# Altium PCB PCBA-2121-01_tabbed.PcbDoc
Units mm, origin at the board's own origin, x right, y up, seen from the top; angles counter-clockwise.
Board outline 63.5 x 75 mm, 4 copper layers (L1, L2, L3, L4), stack 1.58 mm thick; 4 components, 51 nets, 44 pads, 0 vias.
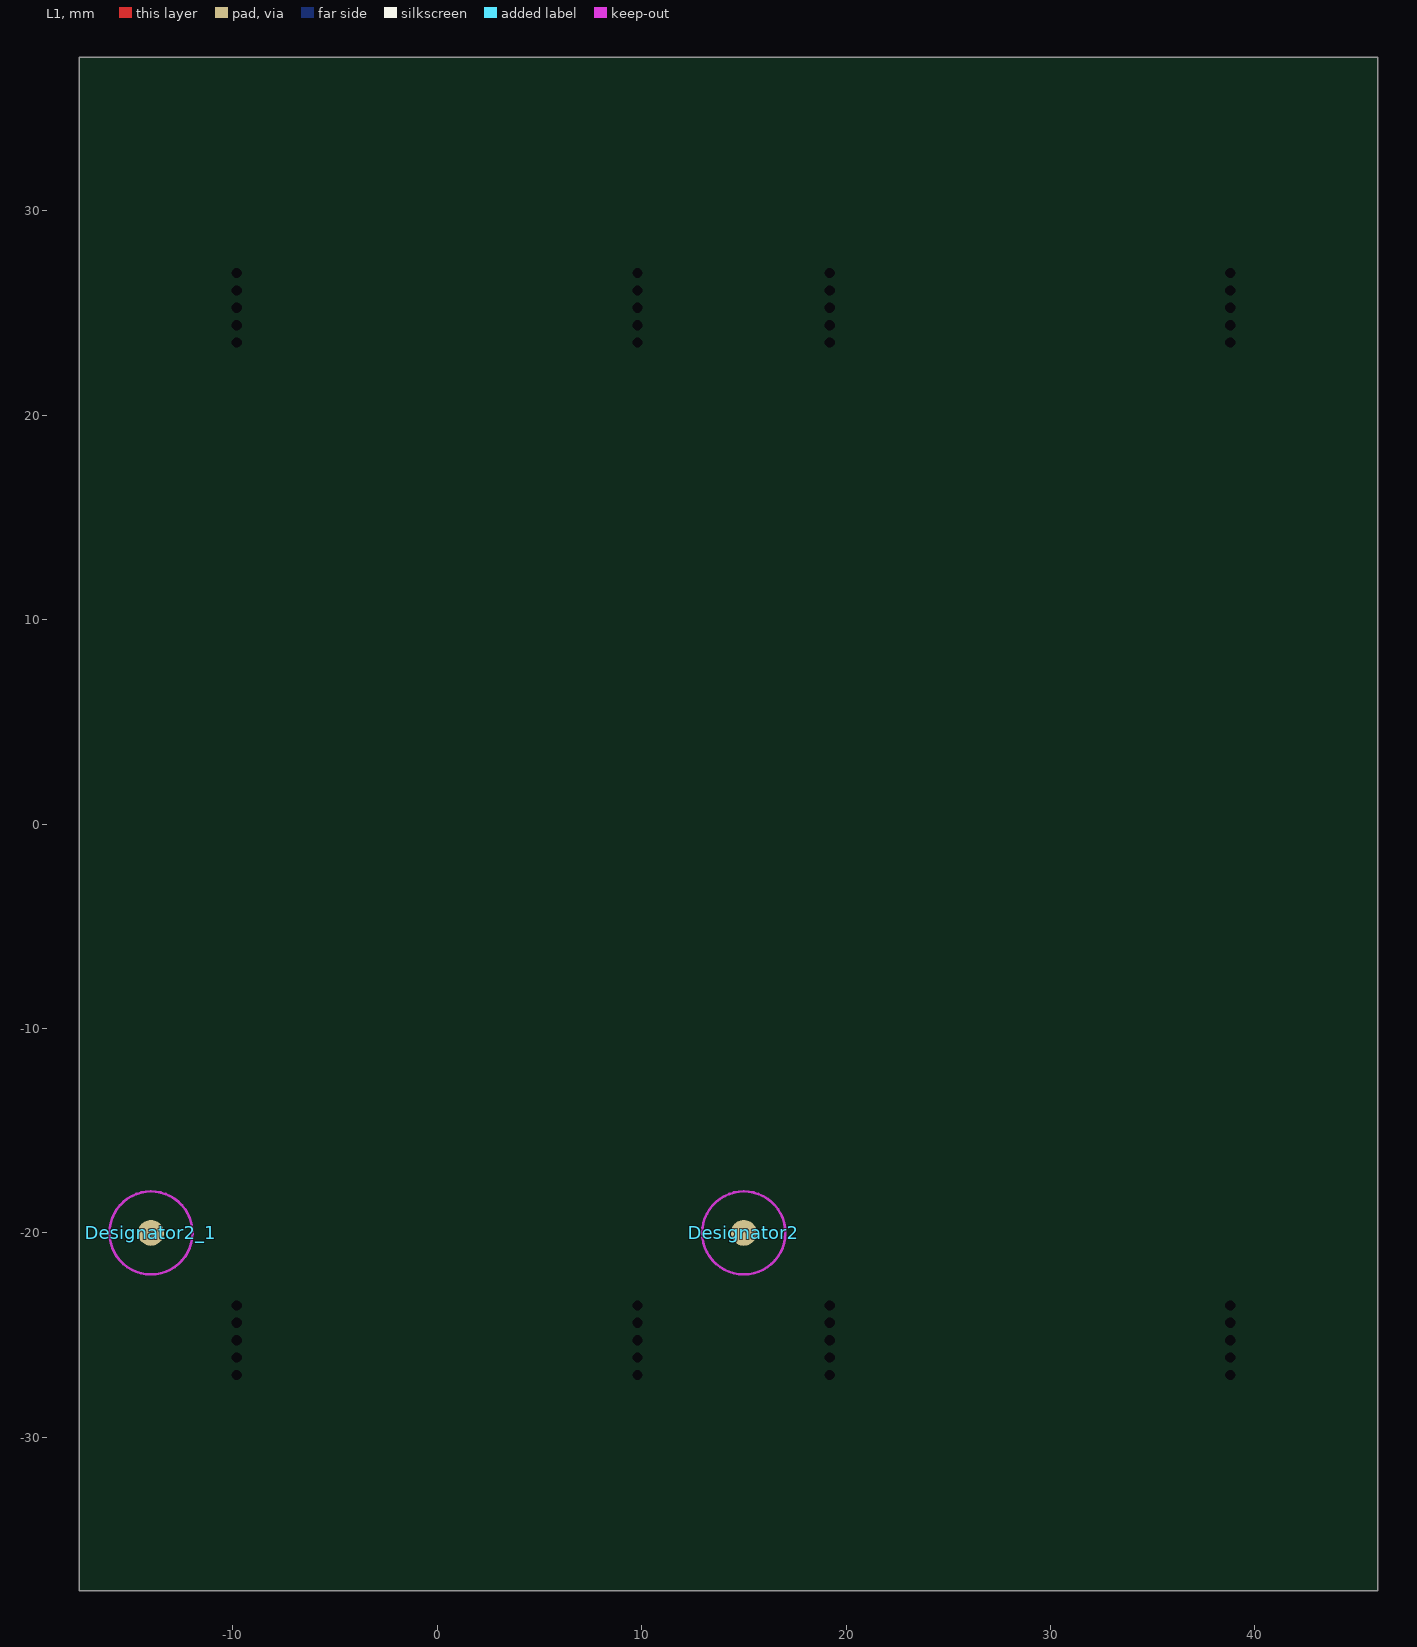
[diagram p0: L1 view]
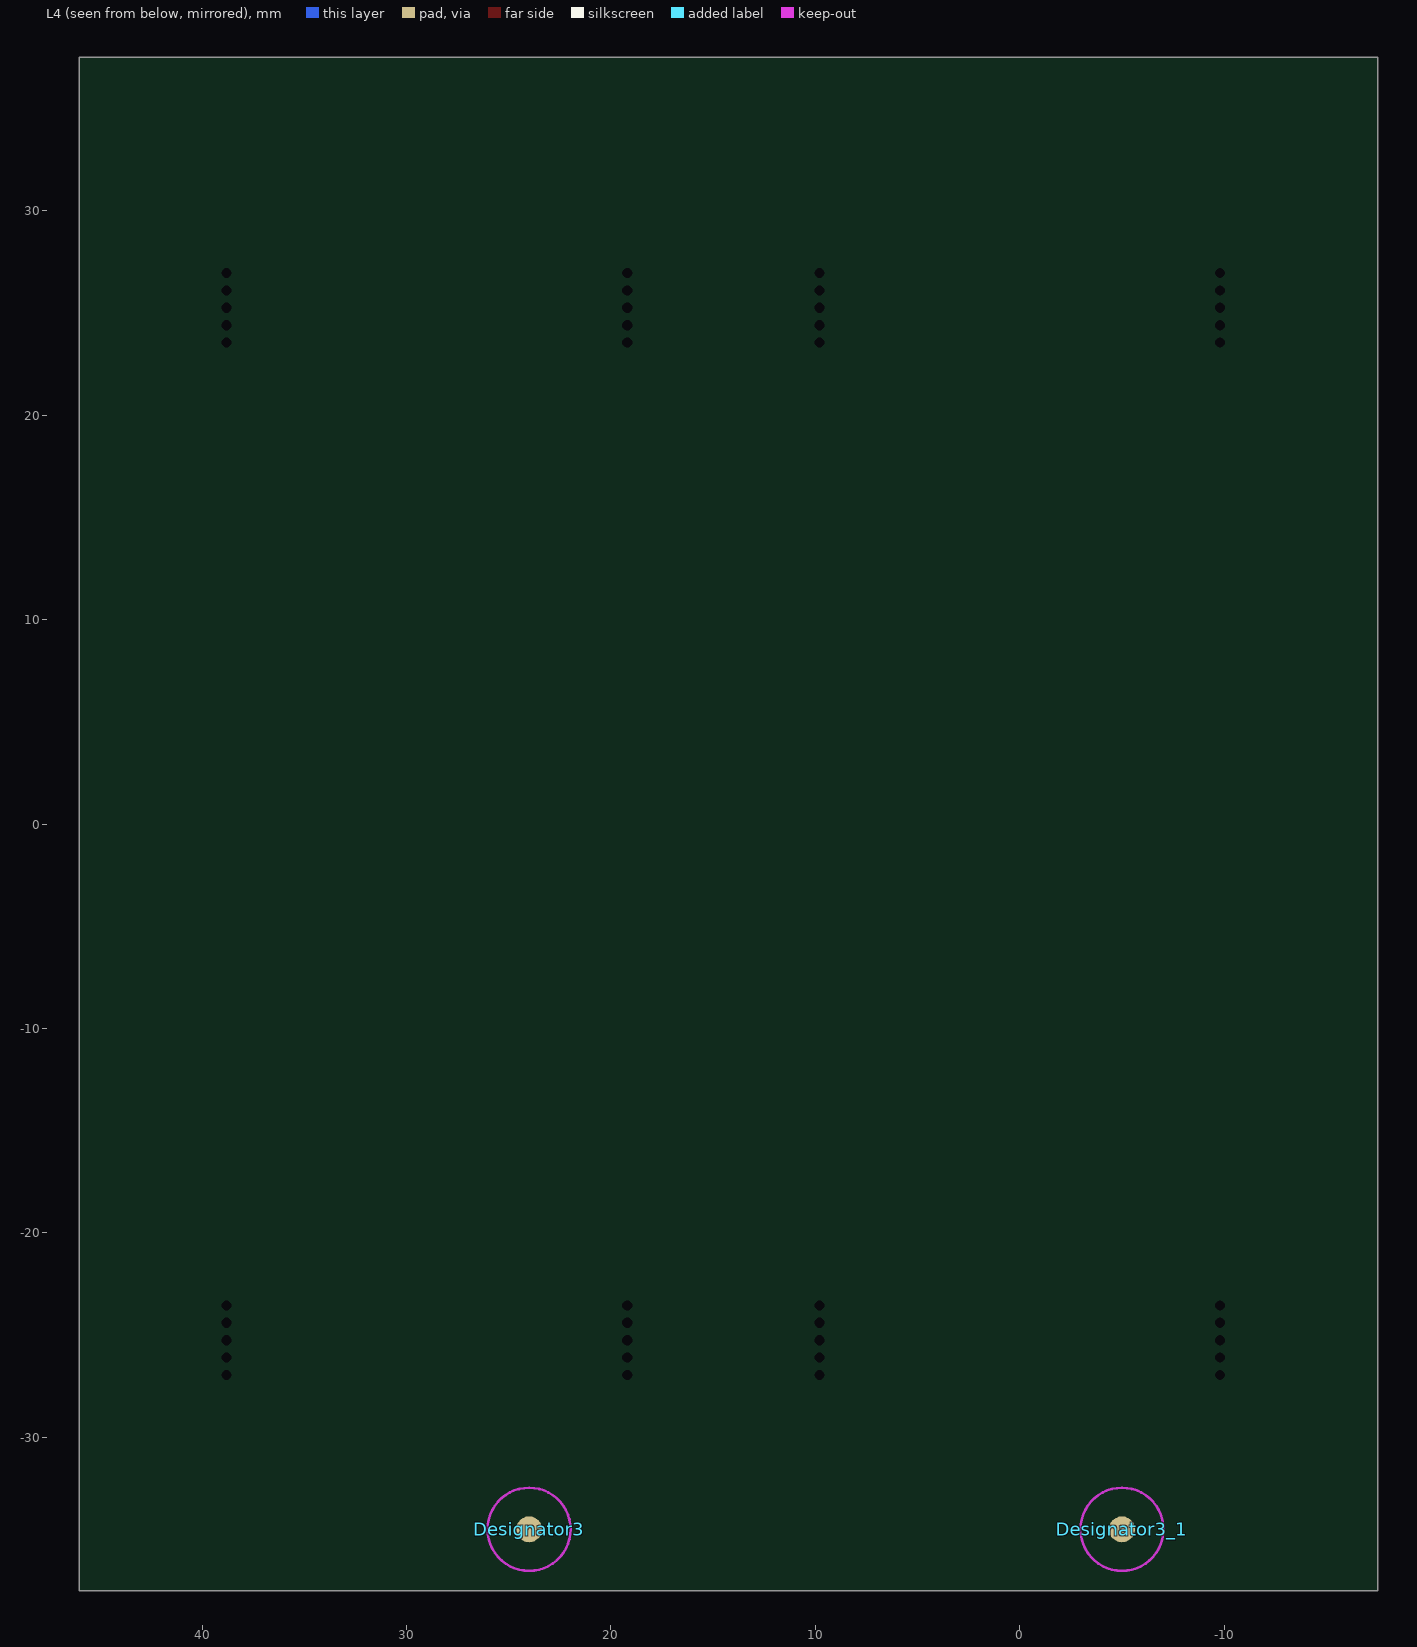
[diagram p1: L4 view, seen from below]

## Layer stack, top to bottom
Top Solder: solder mask 0.0102, Solder Resist, Dk 3.5
L1: signal copper 0.0432
Dielectric 1: prepreg 0.0711, PP-006, Dk 4.1
L2: signal copper 0.035
Dielectric 4: core 1.2811, Dk 4.2
L3: signal copper 0.035
Dielectric 2: prepreg 0.0711, PP-006, Dk 4.1
L4: signal copper 0.0432
Bottom Solder: solder mask 0.0102, Solder Resist, Dk 3.5

## Board outline
-17.5,-37.5 -17.5,37.5 46,37.5 46,-37.5

## Design rules (kind name [scope] priority, off if disabled: settings)
Clearance [All] p1: gap=0.178 ignorepadtopadclearanceinfootprint=FALSE
ComponentClearance NO_BOM [IsNoBOMComponent] p1: gap=0 collisioncheckmode=3 verticalgap=0 showdistances=FALSE donotcheckwithout3dbody=TRUE
ComponentClearance ComponentClearance_2 [HasFootprint('ARJM11C7-114-BA-EW2-Footprint-1') vs HasFootprint('39-30-1020')] p2: gap=-254 collisioncheckmode=3 verticalgap=2540 showdistances=FALSE
ComponentClearance ComponentClearance_1 [HasFootprint('ARJM11C7-114-BA-EW2-Footprint-1') vs HasFootprint('ARJM11C7-114-BA-EW2-Footprint-1')] p3: gap=-254 collisioncheckmode=3 verticalgap=2540 showdistances=FALSE
ComponentClearance [All] p4: gap=0.254 collisioncheckmode=3 verticalgap=0.254 showdistances=FALSE
DiffPairsRouting [All] p1: maxlimit=0.254 minlimit=0.203 mostfreqgap=0.203 toplayer_minwidth=0.178 toplayer_maxwidth=0.381 toplayer_prefwidth=0.178 midlayer1_minwidth=0.178 midlayer1_maxwidth=0.381 midlayer1_prefwidth=0.178 midlayer2_minwidth=0.178 midlayer2_maxwidth=0.381 midlayer2_prefwidth=0.178 bottomlayer_minwidth=0.178 bottomlayer_maxwidth=0.381 bottomlayer_prefwidth=0.178 maxuncoupledlength=12.7
Height [All] p1: minheight=0 maxheight=50.8 prefheight=12.7
HoleSize [All] p1: absolutevalues=TRUE maxlimit=25.4 minlimit=0.025 maxpercent=80.000 minpercent=20.000
HoleToHoleClearance HoleToHoleClearance_1 [HasFootprint('PJ-037A') vs HasFootprint('PJ-037A')] p1: gap=0 allowstackedmicrovias=TRUE
HoleToHoleClearance [All] p2: gap=0.254 allowstackedmicrovias=TRUE
MinimumSolderMaskSliver [All] p1 off: minsoldermaskwidth=0.254
PolygonConnect PolygonConnect_1 [All vs IsNamedPolygon('NO_THERMAL')] p1: connectstyle=Direct reliefconductorwidth=0.254 reliefentries=4 polygonreliefangle="90 Angle" airgapwidth=0.254
PolygonConnect [All] p2: thpad.connectstyle=Relief thpad.reliefconductorwidth=0.254 thpad.reliefentries=4 thpad.polygonreliefangle="90 Angle" thpad.airgapwidth=0.254 smdpad.connectstyle=Relief smdpad.reliefconductorwidth=0.254 smdpad.reliefentries=4 smdpad.polygonreliefangle="90 Angle" smdpad.airgapwidth=0.254 via.connectstyle=Direct via.reliefconductorwidth=0.254 via.reliefentries=4 via.polygonreliefangle="90 Angle" via.airgapwidth=0.254
RoutingVias [All] p1: holewidth=0.305 width=0.559 viastyle="Through Hole" minholewidth=0.305 minwidth=0.559 maxholewidth=1.016 maxwidth=2.54
SilkToSilkClearance [All] p1 off: silktosilkclearance=0.254
SilkToSolderMaskClearance [IsPad] p1 off: minsilkscreentomaskgap=0.254 clearancetoexposedcopper=TRUE
SolderMaskExpansion "Via Tenting" [IsVia] p1: expansion=0.051 istentingtop=TRUE
SolderMaskExpansion SolderMaskExpansion_1 [All] p2: expansion=0.051 istentingtop=FALSE
SupplyNets "Schematic Supply Nets" [InNet('V-')] p1: voltage=0.000
SupplyNets "Schematic Supply Nets_5" [InNet('VBAT')] p2: voltage=0.000
SupplyNets "Schematic Supply Nets_4" [InNet('3V3')] p3: voltage=0.000
SupplyNets "Schematic Supply Nets_3" [InNet('GND')] p4: voltage=0.000
SupplyNets "Schematic Supply Nets_2" [InNet('V+')] p5: voltage=0.000
Width [All] p1: maxlimit=5.08 minlimit=0.178 preferedwidth=0.203
22 further rules are at their usual default settings.

## Classes and differential pairs
differential pair CAN_B: +CAN_B_P -CAN_B_N
differential pair I_SNS: +I_SNS_P -I_SNS_N
differential pair CAN: +CAN_P -CAN_N

## Components (designator, comment, footprint, x,y, rotation, side; value= is the part's Value field where it differs from the comment)
Designator2 "Comment" "New footprint 1" 15,-20 r0 top
Designator2_1 "Comment" "New footprint 1" -14,-20 r0 top
Designator3 "Comment" "New footprint 1" 24,-34.5 r180 bottom
Designator3_1 "Comment" "New footprint 1" -5,-34.5 r180 bottom

## Footprints (in the part's own frame and the unit in brackets; to place one, negate y for a bottom-side part, rotate by r counter-clockwise, add the part's x,y. Pads: shape width x height; smd on the part's side, far side on the other; paste and mask are expansions set on the pad)
"New footprint 1" [mm]
  round 1.27 smd paste-2.54 mask+1.27: F(0,0)
  L1 keep-out circle w0.127: c0,0 r2.032

## Free pads (board coordinates)
  round 0 hole 0.5 unplated: 0(-9.8,-26.95) 0(-9.8,-26.1) 0(-9.8,-25.25) 0(-9.8,-24.4) 0(-9.8,-23.55) 0(-9.8,23.55) 0(-9.8,24.4) 0(-9.8,25.25) 0(-9.8,26.1) 0(-9.8,26.95) 0(9.8,-26.95) 0(9.8,-26.1) 0(9.8,-25.25) 0(9.8,-24.4) 0(9.8,-23.55) 0(9.8,23.55) 0(9.8,24.4) 0(9.8,25.25) 0(9.8,26.1) 0(9.8,26.95) 0(19.2,-26.95) 0(19.2,-26.1) 0(19.2,-25.25) 0(19.2,-24.4) 0(19.2,-23.55) 0(19.2,23.55) 0(19.2,24.4) 0(19.2,25.25) 0(19.2,26.1) 0(19.2,26.95) 0(38.8,-26.95) 0(38.8,-26.1) 0(38.8,-25.25) 0(38.8,-24.4) 0(38.8,-23.55) 0(38.8,23.55) 0(38.8,24.4) 0(38.8,25.25) 0(38.8,26.1) 0(38.8,26.95)

## Nets (pads, with @x,y where several pads share a name; then routed paths per layer and width w, separated by ;. In a path a pad name is that pad's centre, name@x,y a point inside that pad or via, vN(x,y) a via of type N, cw(c..) or ccw(c..) an arc to the next point about the centre after c; other vN are vias at no path point)
3V3: 
CAN_B_N: 
CAN_B_P: 
CAN_N: 
CAN_P: 
CAN_RX: 
CAN_TX: 
EN_N: 
EN_P: 
GND: 
I_SNS_N: 
I_SNS_P: 
IBAT_SNS: 
LED_B: 
LED_G: 
LED_R: 
LED_SW: 
NetC16_2: 
NetD1_A: 
NetD1_C: 
NetD2_A: 
NetJ4_4: 
NetJ5_4: 
NetLED1_A: 
NetLED2_1: 
NetLED2_3: 
NetLED2_4: 
NetQ3_D: 
NetQ4_G: 
NetR14_2: 
NetR16_1: 
NetRA1_2: 
NetU4_5: 
NRST: 
OUTPUT_EN: 
PB_BUF: 
PB_EXT: 
PB_EXT_RTN: 
SCL: 
SDA: 
SHDN: 
SNS_EN: 
SPKR: 
STB: 
SWCLK: 
SWDIO: 
SWO: 
V+: 
V-: 
VBAT: 
VBAT_SNS: 
pads on no net: Designator2.F Designator2_1.F Designator3.F Designator3_1.F

## Silkscreen, mask and mechanical layers (free items; w line width, h text height)
Panel Outline:
  lines w0.254: -17.5,-37.5 46,-37.5 46,37.5 -17.5,37.5 -17.5,-37.5 ; -11.5,-29 ccw(c-8.5,-29) -8.5,-32 8.5,-32 ccw(c8.5,-29) 11.5,-29 11.5,-28 ccw(c10.5,-28) 10.5,-27 ccw(c10.5,-28) 9.5,-28 9.5,-29 cw(c8.5,-29) 8.5,-30 -8.5,-30 cw(c-8.5,-29) -9.5,-29 -9.5,-28 ccw(c-10.5,-28) -10.5,-27 ccw(c-10.5,-28) -11.5,-28 -11.5,-29 ; -11.5,-22.5 ccw(c-10.5,-22.5) -10.5,-23.5 ccw(c-10.5,-22.5) -9.5,-22.5 -9.5,22.5 ccw(c-10.5,22.5) -10.5,23.5 ccw(c-10.5,22.5) -11.5,22.5 -11.5,-22.5 ; -11.5,28 ccw(c-10.5,28) -10.5,27 ccw(c-10.5,28) -9.5,28 -9.5,29 cw(c-8.5,29) -8.5,30 8.5,30 cw(c8.5,29) 9.5,29 9.5,28 ccw(c10.5,28) 10.5,27 ccw(c10.5,28) 11.5,28 11.5,29 ccw(c8.5,29) 8.5,32 -8.5,32 ccw(c-8.5,29) -11.5,29 -11.5,28 ; 9.5,-22.5 ccw(c10.5,-22.5) 10.5,-23.5 ccw(c10.5,-22.5) 11.5,-22.5 11.5,22.5 ccw(c10.5,22.5) 10.5,23.5 ccw(c10.5,22.5) 9.5,22.5 9.5,-22.5 ; 10.5,-22.5 10.5,-22.5 ; 17.5,-29 ccw(c20.5,-29) 20.5,-32 37.5,-32 ccw(c37.5,-29) 40.5,-29 40.5,-28 ccw(c39.5,-28) 39.5,-27 ccw(c39.5,-28) 38.5,-28 38.5,-29 cw(c37.5,-29) 37.5,-30 20.5,-30 cw(c20.5,-29) 19.5,-29 19.5,-28 ccw(c18.5,-28) 18.5,-27 ccw(c18.5,-28) 17.5,-28 17.5,-29 ; 17.5,-22.5 ccw(c18.5,-22.5) 18.5,-23.5 ccw(c18.5,-22.5) 19.5,-22.5 19.5,22.5 ccw(c18.5,22.5) 18.5,23.5 ccw(c18.5,22.5) 17.5,22.5 17.5,-22.5 ; 17.5,28 ccw(c18.5,28) 18.5,27 ccw(c18.5,28) 19.5,28 19.5,29 cw(c20.5,29) 20.5,30 37.5,30 cw(c37.5,29) 38.5,29 38.5,28 ccw(c39.5,28) 39.5,27 ccw(c39.5,28) 40.5,28 40.5,29 ccw(c37.5,29) 37.5,32 20.5,32 ccw(c20.5,29) 17.5,29 17.5,28 ; 38.5,-22.5 ccw(c39.5,-22.5) 39.5,-23.5 ccw(c39.5,-22.5) 40.5,-22.5 40.5,22.5 ccw(c39.5,22.5) 39.5,23.5 ccw(c39.5,22.5) 38.5,22.5 38.5,-22.5 ; 39.5,-22.5 39.5,-22.5
Route Tool Path:
  lines w2: -10.5,-28 -10.5,-29 ccw(c-8.5,-29) -8.5,-31 8.5,-31 ccw(c8.5,-29) 10.5,-29 10.5,-28 ; -10.5,-22.5 -10.5,22.5 ; -10.5,28 -10.5,29 cw(c-8.5,29) -8.5,31 8.5,31 cw(c8.5,29) 10.5,29 10.5,28 ; 10.5,-22.5 10.5,22.5 ; 18.5,-28 18.5,-29 ccw(c20.5,-29) 20.5,-31 37.5,-31 ccw(c37.5,-29) 39.5,-29 39.5,-28 ; 18.5,-22.5 18.5,22.5 ; 18.5,28 18.5,29 cw(c20.5,29) 20.5,31 37.5,31 cw(c37.5,29) 39.5,29 39.5,28 ; 39.5,-22.5 39.5,22.5

## Panel: embedded boards
"PCBA-2121-01.PcbDoc" at 0,0, 1 rows x 2 columns, spacing 63.5 x 29, rotation 0